# Altium PCB 混频器-腐蚀板.PcbDoc
Units mil, origin at the board's own origin, x right, y up, seen from the top; angles counter-clockwise.
Board outline 6000 x 4000 mil, 2 copper layers (Top Layer, Bottom Layer); 28 components, 0 nets, 84 pads, 32 vias.
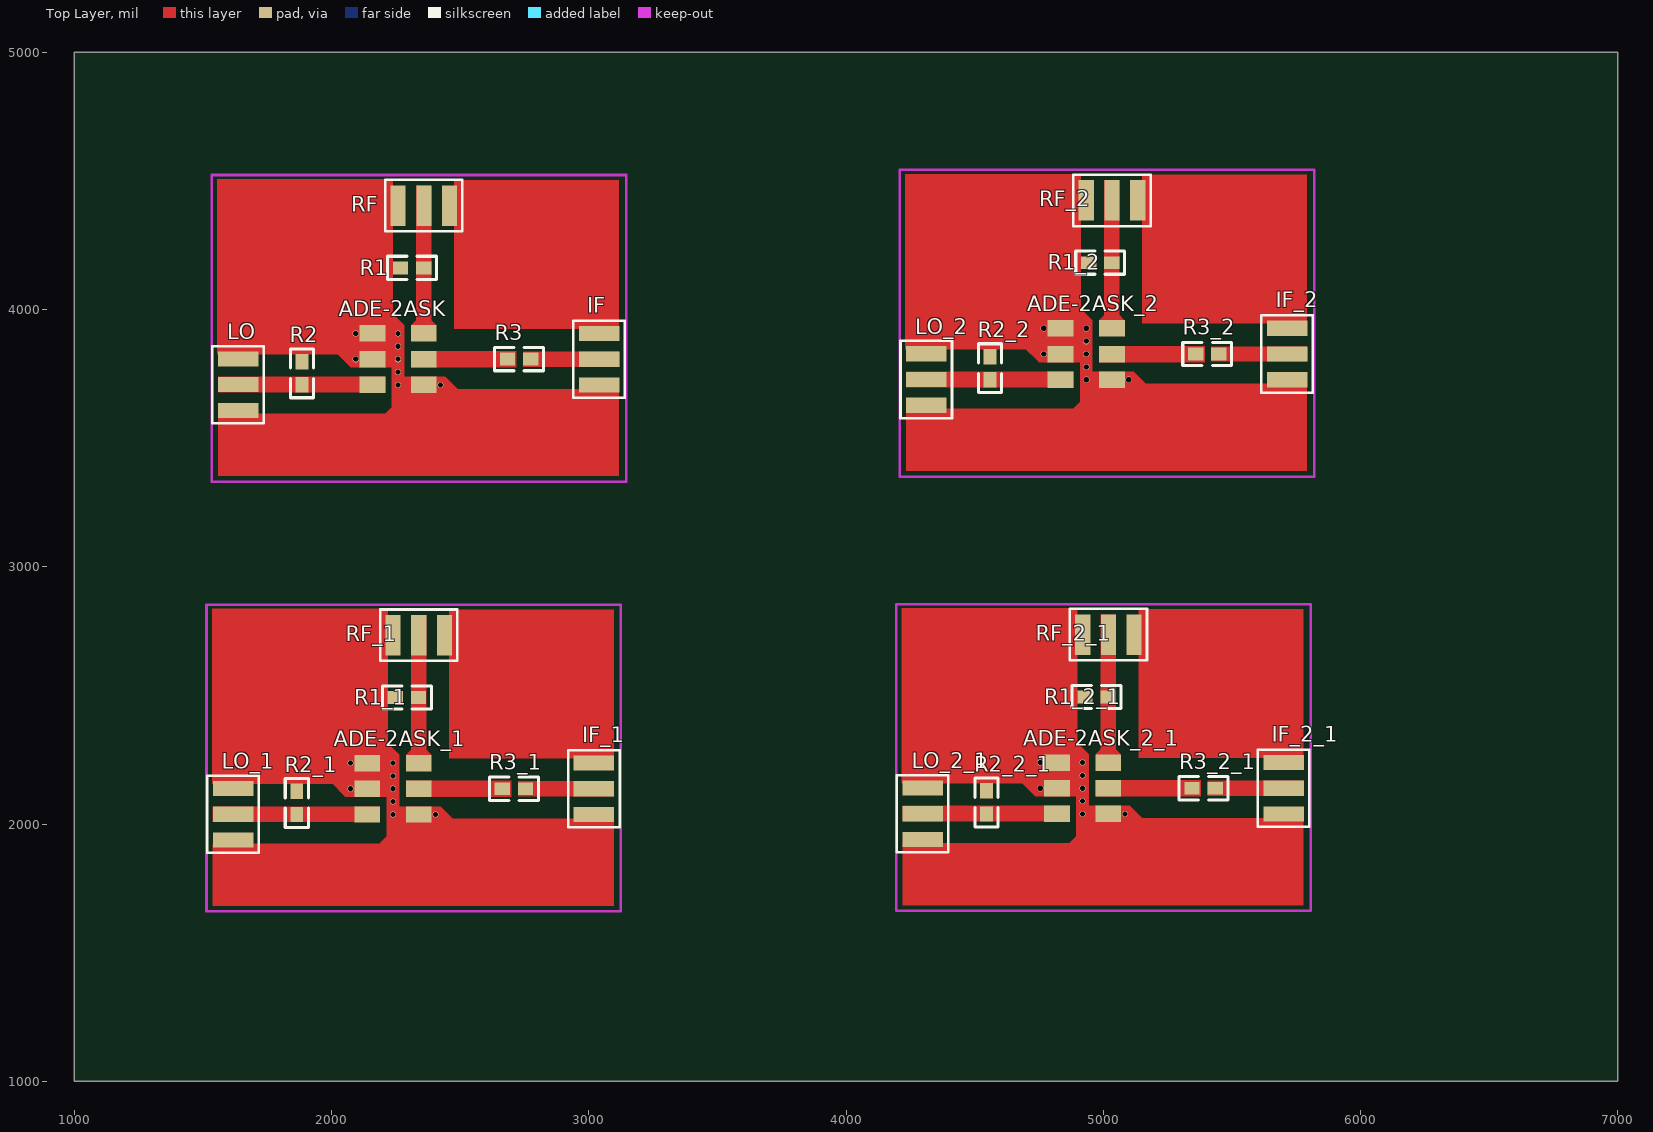
[diagram p0: Top Layer view]
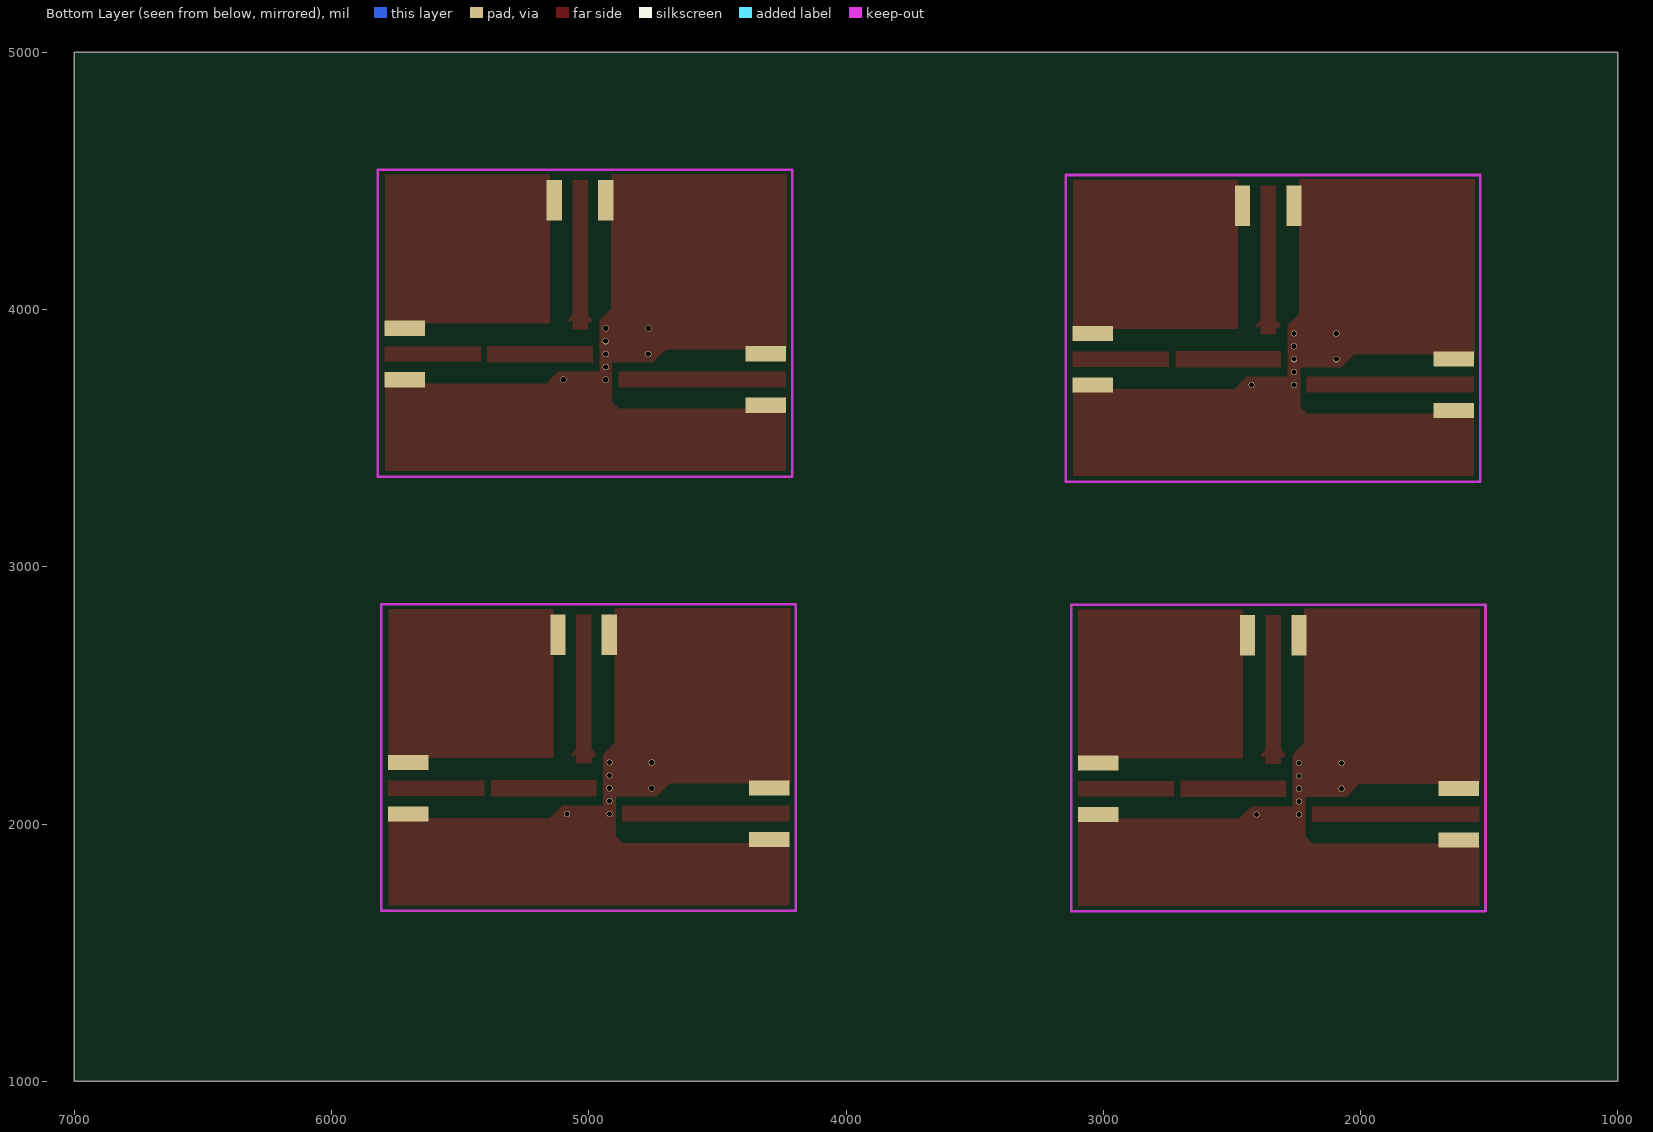
[diagram p1: Bottom Layer view, seen from below]

## Layer stack, top to bottom
Top Solder: solder mask 0.4, Solder Resist, Dk 3.5
Top Layer: signal copper 1.4
Dielectric 1: dielectric 12.6, FR-4, Dk 4.8
Bottom Layer: signal copper 1.4
Bottom Solder: solder mask 0.4, Solder Resist, Dk 3.5

## Board outline
1000,1000 7000,1000 7000,5000 1000,5000

## Design rules (kind name [scope] priority, off if disabled: settings)
Clearance [All] p1: gap=10
PolygonConnect [All] p1: connectstyle=Relief reliefconductorwidth=10 reliefentries=4 polygonreliefangle="90 Angle" airgapwidth=10
RoutingVias [All] p1: holewidth=28 width=50 viastyle="Through Hole" minholewidth=28 minwidth=50 maxholewidth=28 maxwidth=50
SolderMaskExpansion [All] p1: expansion=4
Width [All] p1: maxlimit=10 minlimit=10 preferedwidth=10
30 further rules are at their usual default settings.

## Components (designator, comment, footprint, x,y, rotation, side; value= is the part's Value field where it differs from the comment)
ADE-2ASK "4 HEADER" PL-052 2409,3675 r90 top
ADE-2ASK_1 "4 HEADER" PL-052 2389,2005 r90 top (schematic designator ADE-2ASK)
ADE-2ASK_2 "4 HEADER" PL-052 5084,3695 r90 top (schematic designator ADE-2ASK)
ADE-2ASK_2_1 "4 HEADER" PL-052 5070,2007 r90 top (schematic designator ADE-2ASK)
IF "SMA-2" SMA-2 3040,3807 r90 top
IF_1 "SMA-2" SMA-2 3020,2137 r90 top (schematic designator IF)
IF_2 "SMA-2" SMA-2 5715,3827 r90 top (schematic designator IF)
IF_2_1 "SMA-2" SMA-2 5701,2139 r90 top (schematic designator IF)
LO "SMA-2" SMA-2 1637,3708 r270 top
LO_1 "SMA-2" SMA-2 1617,2038 r270 top (schematic designator LO)
LO_2 "SMA-2" SMA-2 4312,3728 r270 top (schematic designator LO)
LO_2_1 "SMA-2" SMA-2 4298,2040 r270 top (schematic designator LO)
R1 "RES" 0805 2358,4162 r180 top
R1_1 "RES" 0805 2338,2492 r180 top (schematic designator R1)
R1_2 "RES" 0805 5033,4182 r180 top (schematic designator R1)
R1_2_1 "RES" 0805 5019,2494 r180 top (schematic designator R1)
R2 "RES" 0805 1885,3707 r90 top
R2_1 "RES" 0805 1865,2037 r90 top (schematic designator R2)
R2_2 "RES" 0805 4560,3727 r90 top (schematic designator R2)
R2_2_1 "RES" 0805 4546,2039 r90 top (schematic designator R2)
R3 "RES" 0805 2774,3807 r180 top
R3_1 "RES" 0805 2754,2137 r180 top (schematic designator R3)
R3_2 "RES" 0805 5449,3827 r180 top (schematic designator R3)
R3_2_1 "RES" 0805 5435,2139 r180 top (schematic designator R3)
RF "SMA-2" SMA-2 2359,4404 r180 top
RF_1 "SMA-2" SMA-2 2339,2734 r180 top (schematic designator RF)
RF_2 "SMA-2" SMA-2 5034,4424 r180 top (schematic designator RF)
RF_2_1 "SMA-2" SMA-2 5020,2736 r180 top (schematic designator RF)

## Footprints (in the part's own frame and the unit in brackets; to place one, negate y for a bottom-side part, rotate by r counter-clockwise, add the part's x,y. Pads: shape width x height; smd on the part's side, far side on the other; paste and mask are expansions set on the pad)
0805 [mil]
  rect 60x50 smd: 1(0,0) 2(90,0)
  silkscreen extent -50,-45 140,45
PL-052 [mil]
  rect 64x100 smd: 1(32,50) 1(132,250) 1(232,250) 2(132,50) 3(232,50) 4(32,250)
  Top Layer region: 100,170 264,170 264,335 100,335
  Top Layer region: 0,125 264,125 264,175 0,175
  Top Layer region: 0,-35 64,-35 64,175 0,175
SMA-2 [mm]
  rect 1.5x4 smd: 1(0,0)
  rect 1.5x4 all layers, no hole: 2(2.54,0) 3(-2.54,0)
  silkscreen extent -3.81,-2.54 3.81,2.54, body extent -3,-11.89 3,1.71, height 3.2

## Part data
ADE-2ASK ADE-2ASK_1 ADE-2ASK_2 ADE-2ASK_2_1: "4 Pin Header"

## Via types
v1: diameter 24, hole 20, Top Layer to Bottom Layer, 32 vias

## Nets (pads, with @x,y where several pads share a name; then routed paths per layer and width w, separated by ;. In a path a pad name is that pad's centre, name@x,y a point inside that pad or via, vN(x,y) a via of type N, cw(c..) or ccw(c..) an arc to the next point about the centre after c; other vN are vias at no path point)
pads on no net: ADE-2ASK.1 ADE-2ASK.2 ADE-2ASK.3 ADE-2ASK.4 ADE-2ASK_1.1 ADE-2ASK_1.2 ADE-2ASK_1.3 ADE-2ASK_1.4 ADE-2ASK_2.1 ADE-2ASK_2.2 ADE-2ASK_2.3 ADE-2ASK_2.4 ADE-2ASK_2_1.1 ADE-2ASK_2_1.2 ADE-2ASK_2_1.3 ADE-2ASK_2_1.4 IF.1 IF.2 IF.3 IF_1.1 IF_1.2 IF_1.3 IF_2.1 IF_2.2 IF_2.3 IF_2_1.1 IF_2_1.2 IF_2_1.3 LO.1 LO.2 LO.3 LO_1.1 LO_1.2 LO_1.3 LO_2.1 LO_2.2 LO_2.3 LO_2_1.1 LO_2_1.2 LO_2_1.3 R1.1 R1.2 R1_1.1 R1_1.2 R1_2.1 R1_2.2 R1_2_1.1 R1_2_1.2 R2.1 R2.2 R2_1.1 R2_1.2 R2_2.1 R2_2.2 R2_2_1.1 R2_2_1.2 R3.1 R3.2 R3_1.1 R3_1.2 R3_2.1 R3_2.2 R3_2_1.1 R3_2_1.2 RF.1 RF.2 RF.3 RF_1.1 RF_1.2 RF_1.3 RF_2.1 RF_2.2 RF_2.3 RF_2_1.1 RF_2_1.2 RF_2_1.3
copper on no net:
  other v1: 2239,2037 2404,2037 4920,2039 5085,2039 2239,2087 4920,2089 2074,2137 2239,2137 4755,2139 4920,2139 2239,2187 4920,2189 2074,2237 2239,2237 4755,2239 4920,2239 2259,3707 2424,3707 4934,3727 5099,3727 2259,3757 4934,3777 2094,3807 2259,3807 4769,3827 4934,3827 2259,3857 4934,3877 2094,3907 2259,3907 4769,3927 4934,3927

## Keep-outs
Keep-Out Layer:
  lines w10: 1514,1660 1514,2853 3125,2853 3125,1660 1514,1660 ; 1534,3330 1534,4523 3145,4523 3145,3330 1534,3330 ; 4195,1662 5806,1662 5806,2855 4195,2855 4195,1662 ; 4209,3350 4209,4543 5820,4543 5820,3350 4209,3350

## Other copper
Top Layer:
  region: 5059.5,2260.5 5070,2271 5046.5,2294.5 5036,2284
  region: 4984.5,2256.5 5015,2287 5000.5,2301.5 4970,2271
  rectangle: 4989,2235 5050,2815
  rectangle: 5405,2109 5780,2169
  rectangle: 4970,2107 5381,2171
  rectangle: 4219,2009 4870,2071
  rectangle: 4216,2271 4900,2839
  rectangle: 4216,2157 4741,2271
  rectangle: 4219,1684 5779,1927
  rectangle: 4895,1927 5779,2024
  rectangle: 5137,2257 5779,2836
  region: 4910,2236 4945,2271 4878,2338 4843,2303
  region: 4735,2107 4768.5,2140.5 4710,2199 4676.5,2165.5
  region: 5126,1953 5174.5,2001.5 5105,2071 5056.5,2022.5
  region: 4860,1870 4926.5,1936.5 4902,1961 4835.5,1894.5
  region: 4874,3558 4940.5,3624.5 4916,3649 4849.5,3582.5
  region: 5140,3641 5188.5,3689.5 5119,3759 5070.5,3710.5
  region: 4749,3795 4782.5,3828.5 4724,3887 4690.5,3853.5
  region: 4924,3924 4959,3959 4892,4026 4857,3991
  rectangle: 5151,3945 5793,4524
  rectangle: 4909,3615 5793,3712
  rectangle: 4233,3372 5793,3615
  rectangle: 4230,3845 4755,3959
  rectangle: 4230,3959 4914,4527
  rectangle: 4233,3697 4884,3759
  rectangle: 4984,3795 5395,3859
  rectangle: 5419,3797 5794,3857
  rectangle: 5003,3923 5064,4503
  region: 4998.5,3944.5 5029,3975 5014.5,3989.5 4984,3959
  region: 5073.5,3948.5 5084,3959 5060.5,3982.5 5050,3972
  region: 2179,1868 2245.5,1934.5 2221,1959 2154.5,1892.5
  region: 2445,1951 2493.5,1999.5 2424,2069 2375.5,2020.5
  region: 2054,2105 2087.5,2138.5 2029,2197 1995.5,2163.5
  region: 2229,2234 2264,2269 2197,2336 2162,2301
  rectangle: 2456,2255 3098,2834
  rectangle: 2214,1925 3098,2022
  rectangle: 1538,1682 3098,1925
  rectangle: 1535,2155 2060,2269
  rectangle: 1535,2269 2219,2837
  rectangle: 1538,2007 2189,2069
  rectangle: 2289,2105 2700,2169
  rectangle: 2724,2107 3099,2167
  rectangle: 2308,2233 2369,2813
  region: 2303.5,2254.5 2334,2285 2319.5,2299.5 2289,2269
  region: 2378.5,2258.5 2389,2269 2365.5,2292.5 2355,2282
  region: 2199,3538 2265.5,3604.5 2241,3629 2174.5,3562.5
  region: 2465,3621 2513.5,3669.5 2444,3739 2395.5,3690.5
  region: 2074,3775 2107.5,3808.5 2049,3867 2015.5,3833.5
  region: 2249,3904 2284,3939 2217,4006 2182,3971
  rectangle: 2476,3925 3118,4504
  rectangle: 2234,3595 3118,3692
  rectangle: 1558,3352 3118,3595
  rectangle: 1555,3825 2080,3939
  rectangle: 1555,3939 2239,4507
  rectangle: 1558,3677 2209,3739
  rectangle: 2309,3775 2720,3839
  rectangle: 2744,3777 3119,3837
  rectangle: 2328,3903 2389,4483
  region: 2323.5,3924.5 2354,3955 2339.5,3969.5 2309,3939
  region: 2398.5,3928.5 2409,3939 2385.5,3962.5 2375,3952